# EAGLE board SparkFun_GPS_ZED-F9K_pHat (EAGLE 9.5.2)
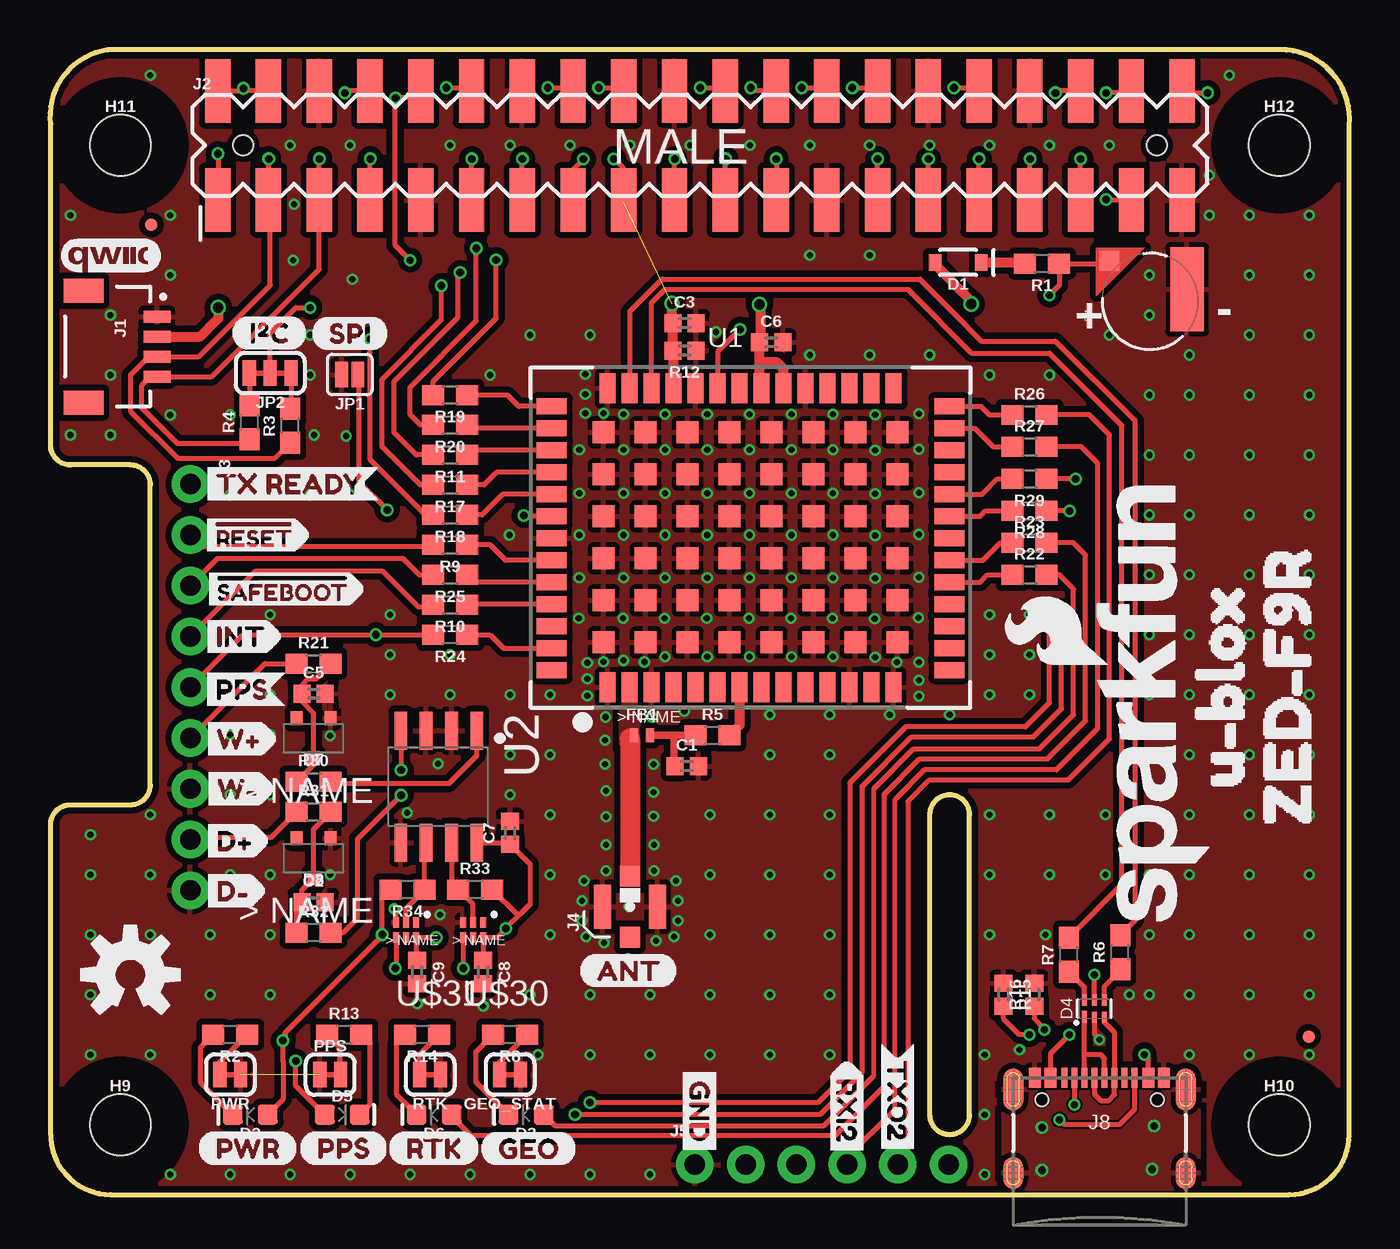
[diagram p0: board, top side]
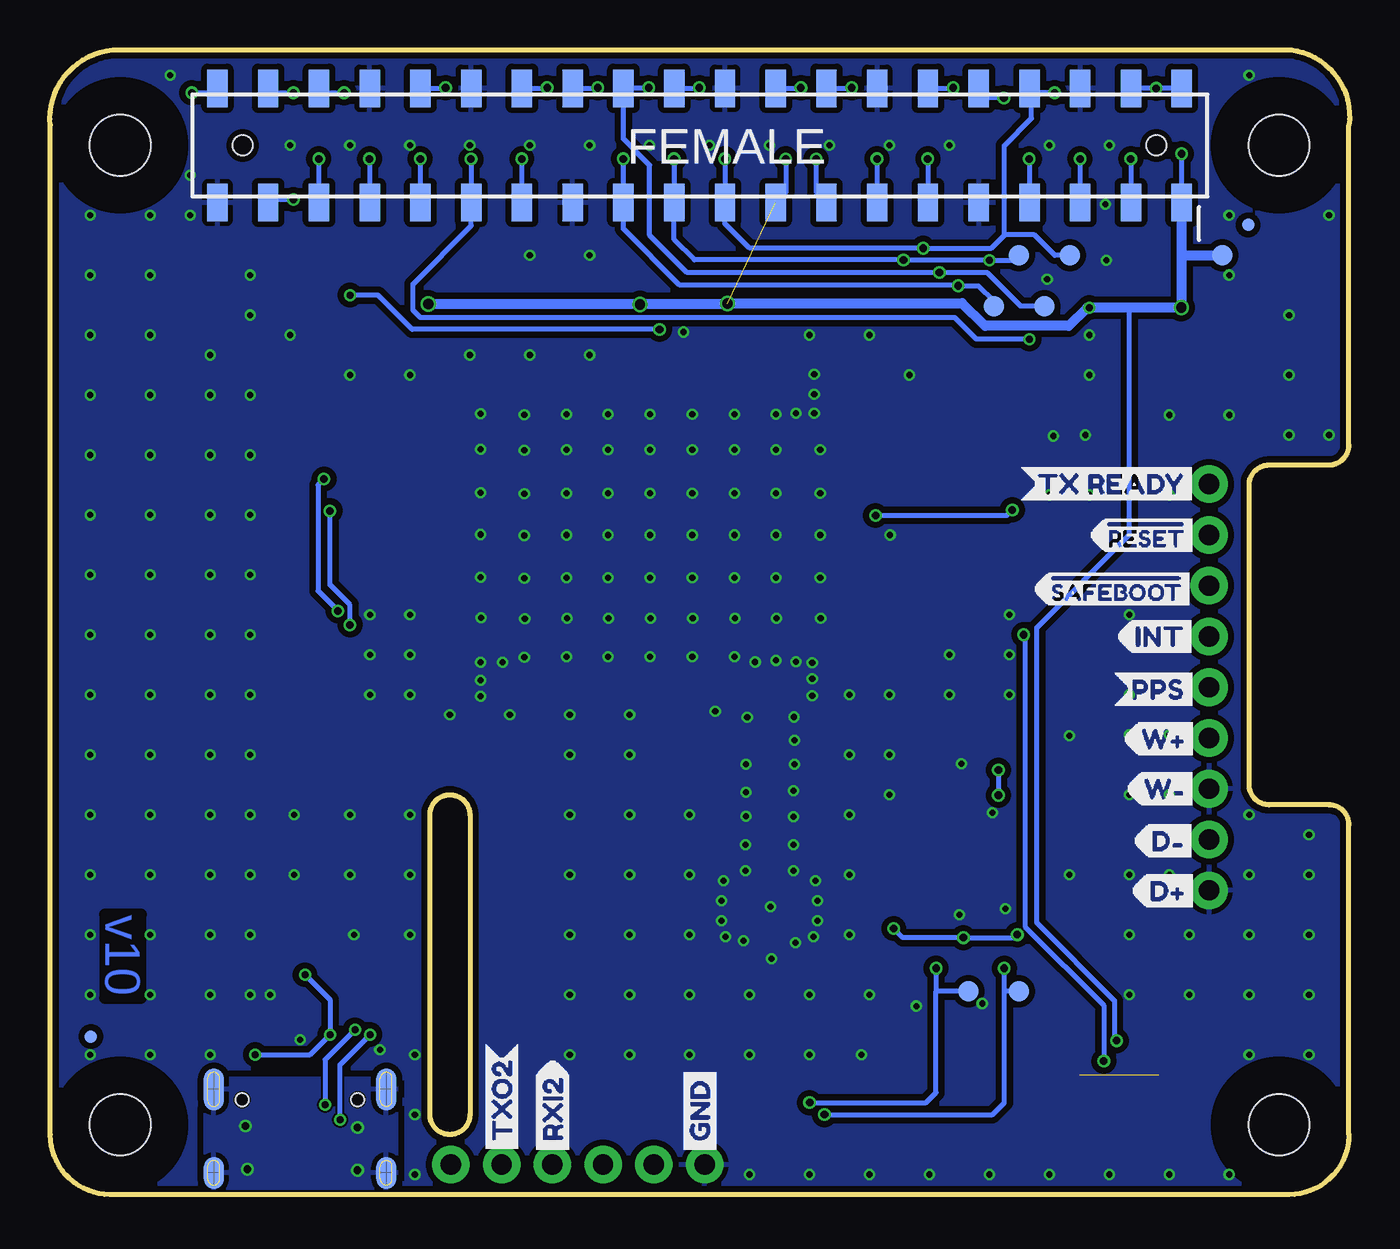
[diagram p1: board, bottom side, seen from below]

Size 65.04 x 57.26 mm. Coordinates in mm from the lower left corner, seen from the top.
Outline: 3.03,0 62.03,0 arc90 65.03,3 65.03,53.5 arc90 61.9,57.26 2.9,57.26 arc90 0.03,53.5 0.03,37.5 arc90 1.03,36.5 4.03,36.5 arc-90 5.03,35.5 5.03,20.5 arc-90 4.03,19.5 1.03,19.5 arc90 0.03,18.5 0.03,3 arc90 3.03,0
Outline: 45.03,3 arc90 46.03,4 46.03,19 arc90 45.03,20 arc90 44.03,19 44.03,4 arc90 45.03,3
Copper layers (1*16): Top 0.035mm / dielectric 1.5mm / Bottom 0.035mm
Design rules "SparkFun-2-layer-FAB-LIMIT": minimum track width 4mil, minimum drill 6mil, track to track 4mil, track to pad 4mil, pad to pad 4mil, via to via 4mil, smd to smd 4mil, copper to edge 4mil, drill to drill 4mil, minimum pad ring 5mil, minimum via ring 5mil, stop-mask expansion 4mil, vias tented up to drill 25mil, thermal gap 10mil
Net classes: 1 Antenna: width 1 mm, clearance 0.3 mm
tRestrict: area 58.4,0.4 to 64.6,6.6; area 0.4,0.4 to 6.6,6.6; area 0.4,49.4 to 6.6,55.6; area 58.4,49.4 to 64.6,55.6
bRestrict: area 0.4,0.4 to 6.6,6.6; area 0.4,49.4 to 6.6,55.6; area 58.4,0.4 to 64.6,6.6; area 58.4,49.4 to 64.6,55.6

## Footprints (pad centres in the part's own frame; a part is rotated, then mirrored left to right if it is on the bottom)
ML414H_IV01E = smd 1 x 1: + 2.022,2.032 | smd 4.2 x 1.7: - 0.6,-1.85
0402 = smd 0.85 x 0.9: 1 -0.58,0; 2 0.58,0
SOD-323 = smd 0.63 x 0.83: A 1.15,0; C -1.15,0
LED-0603 = smd 1 x 1: A -0.877,0; C 0.877,0
SOT886 = smd 0.61 x 0.25: 1 -0.405,0.5 | smd 0.56 x 0.25: 2 -0.43,0; 3 -0.43,-0.5; 4 0.43,-0.5; 5 0.43,0; 6 0.43,0.5
SOT23_BZX = smd 0.6 x 0.7: P1 -0.85,-0.984; P2 0.85,-0.984; P3 0,1.016
0402_MURATA = smd 0.4 x 0.7: P1 -0.4,0; P2 0.4,0
FIDUCIAL-MICRO = smd 0.635 x 0.635: 1 0,0
SMT-JUMPER_2_NC_TRACE_SILK = smd 0.66 x 1.27: 1 -0.521,0; 2 0.521,0
STAND-OFF-TIGHT = hole 3.048: 0,0
JST04_1MM_RA = smd 0.6 x 1.35: 1 -1.5,0; 2 -0.5,0; 3 0.5,0; 4 1.5,0 | smd 1.2 x 2: NC1 2.8,-3.675; NC2 -2.8,-3.675
RASPBERRY_PI_HAT_40_PIN_SMD_STACKABLE_NOHOLES_NOREF = smd 1.27 x 3.175: 1 0,-1.46; 2 0,4; 3 2.54,-1.46; 4 2.54,4; 5 5.08,-1.46; 6 5.08,4; 7 7.62,-1.46; 8 7.62,4; 9 10.16,-1.46; 10 10.16,4; 11 12.7,-1.46; 12 12.7,4; 13 15.24,-1.46; 14 15.24,4; 15 17.78,-1.46; 16 17.78,4; 17 20.32,-1.46; 18 20.32,4; 19 22.86,-1.46; 20 22.86,4; 21 25.4,-1.46; 22 25.4,4; 23 27.94,-1.46; 24 27.94,4; 25 30.48,-1.46; 26 30.48,4; 27 33.02,-1.46; 28 33.02,4; 29 35.56,-1.46; 30 35.56,4; 31 38.1,-1.46; 32 38.1,4; 33 40.64,-1.46; 34 40.64,4; 35 43.18,-1.46; 36 43.18,4; 37 45.72,-1.46; 38 45.72,4; 39 48.26,-1.46; 40 48.26,4 | smd 1.02 x 1.87 bottom: 1B 0,-1.587; 2B 0,4.128; 3B 2.54,-1.587; 4B 2.54,4.128; 5B 5.08,-1.587; 6B 5.08,4.128; 7B 7.62,-1.587; 8B 7.62,4.128; 9B 10.16,-1.587; 10B 10.16,4.128; 11B 12.7,-1.587; 12B 12.7,4.128; 13B 15.24,-1.587; 14B 15.24,4.128; 15B 17.78,-1.587; 16B 17.78,4.128; 17B 20.32,-1.587; 18B 20.32,4.128; 19B 22.86,-1.587; 20B 22.86,4.128; 21B 25.4,-1.587; 22B 25.4,4.128; 23B 27.94,-1.587; 24B 27.94,4.128; 25B 30.48,-1.587; 26B 30.48,4.128; 27B 33.02,-1.587; 28B 33.02,4.128; 29B 35.56,-1.587; 30B 35.56,4.128; 31B 38.1,-1.587; 32B 38.1,4.128; 33B 40.64,-1.587; 34B 40.64,4.128; 35B 43.18,-1.587; 36B 43.18,4.128; 37B 45.72,-1.587; 38B 45.72,4.128; 39B 48.26,-1.587; 40B 48.26,4.128 | hole 1: 1.27,1.27; 46.99,1.27
1X09_NO_SILK = drill 1.016 pad 1.88: 1 0,0; 2 2.54,0; 3 5.08,0; 4 7.62,0; 5 10.16,0; 6 12.7,0; 7 15.24,0; 8 17.78,0; 9 20.32,0
U.FL = smd 2.2 x 0.85: 1 0,1.375; 2 0,-1.375 | smd 1.05 x 1: FEED 1.525,0; NC -1.525,0
1X06_NO_SILK = drill 1.016 pad 1.88: 1 0,0; 2 2.54,0; 3 5.08,0; 4 7.62,0; 5 10.16,0; 6 12.7,0
USB-C-16P = smd 0.3 x 1: A5 -1.25,-0.34; A6 -0.25,-0.34; A7 0.25,-0.34; A8 1.25,-0.34; B5 1.75,-0.34; B6 0.75,-0.34; B7 -0.75,-0.34; B8 -1.75,-0.34 | smd 0.6 x 1: GND -3.225,-0.34; GND2 3.225,-0.34; VBUS1 -2.45,-0.34; VBUS2 2.45,-0.34 | smd 1 x 2.1: SHLD1 -4.32,-0.915; SHLD2 4.32,-0.915 | smd 1 x 2.1 bottom: SHLD3 -4.32,-0.915; SHLD4 4.32,-0.915 | smd 1 x 1.6: SHLD5 -4.32,-5.095; SHLD8 4.32,-5.095 | smd 1 x 1.6 bottom: SHLD6 -4.32,-5.095; SHLD7 4.32,-5.095 | hole 0.65: -2.89,-1.445; 2.89,-1.445
SMT-JUMPER_2_NO_SILK = smd 0.635 x 1.27: 1 -0.406,0; 2 0.406,0
SMT-JUMPER_3_2-NC_TRACE_SILK = smd 0.66 x 1.27: 1 -1.041,0; 2 0,0; 3 1.041,0
0603 = smd 1.1 x 1: 1 -0.85,0; 2 0.85,0
PAD.03X.04 = smd 1.016 x 1.016: P$1 0,0
UBLOX_ZED_F9R = smd 1.1 x 1.1: G1 -7.312,-5.37; G2 -5.212,-5.37; G3 -3.112,-5.37; G4 -1.012,-5.37; G5 1.088,-5.37; G6 3.188,-5.37; G7 5.288,-5.37; G8 7.388,-5.37; G9 7.388,-3.27; G10 5.288,-3.27; G11 3.188,-3.27; G12 1.088,-3.27; G13 -1.012,-3.27; G14 -3.112,-3.27; G15 -5.212,-3.27; G16 -7.312,-3.27; G17 -7.312,-1.17; G18 -5.212,-1.17; G19 -3.112,-1.17; G20 -1.012,-1.17; G21 1.088,-1.17; G22 3.188,-1.17; G23 5.288,-1.17; G24 7.388,-1.17; G25 7.388,0.93; G26 5.288,0.93; G27 3.188,0.93; G28 1.088,0.93; G29 -1.012,0.93; G30 -3.112,0.93; G31 -5.212,0.93; G32 -7.312,0.93; G33 -7.312,3.03; G34 -5.212,3.03; G35 -3.112,3.03; G36 -1.012,3.03; G37 1.088,3.03; G38 3.188,3.03; G39 5.288,3.03; G40 7.388,3.03; G41 7.388,5.13; G42 5.288,5.13; G43 3.188,5.13; G44 1.088,5.13; G45 -1.012,5.13; G46 -3.112,5.13; G47 -5.212,5.13; G48 -7.312,5.13 | smd 0.8 x 1.5: P1 -7.112,-7.62; P2 -6.012,-7.62; P3 -4.912,-7.62; P4 -3.812,-7.62; P5 -2.712,-7.62; P6 -1.612,-7.62; P7 -0.512,-7.62; P8 0.588,-7.62; P9 1.688,-7.62; P10 2.788,-7.62; P11 3.888,-7.62; P12 4.988,-7.62; P13 6.088,-7.62; P14 7.188,-7.62; P28 7.188,7.33; P29 6.088,7.33; P30 4.988,7.33; P31 3.888,7.33; P32 2.788,7.33; P33 1.688,7.33; P34 0.588,7.33; P35 -0.512,7.33; P36 -1.612,7.33; P37 -2.712,7.33; P38 -3.812,7.33; P39 -4.912,7.33; P40 -6.012,7.33; P41 -7.112,7.33 | smd 1.5 x 0.8: P15 9.988,-6.77; P16 9.988,-5.67; P17 9.988,-4.57; P18 9.988,-3.47; P19 9.988,-2.37; P20 9.988,-1.27; P21 9.988,-0.17; P22 9.988,0.93; P23 9.988,2.03; P24 9.988,3.13; P25 9.988,4.23; P26 9.988,5.33; P27 9.988,6.43; P42 -9.912,6.43; P43 -9.912,5.33; P44 -9.912,4.23; P45 -9.912,3.13; P46 -9.912,2.03; P47 -9.912,0.93; P48 -9.912,-0.17; P49 -9.912,-1.27; P50 -9.912,-2.37; P51 -9.912,-3.47; P52 -9.912,-4.57; P53 -9.912,-5.67; P54 -9.912,-6.77
SOP_8-PIN = smd 1.9 x 0.64: P1 -2.921,2.032; P2 -2.921,0.762; P3 -2.921,-0.508; P4 -2.921,-1.778; P5 2.679,-1.778; P6 2.679,-0.508; P7 2.679,0.762; P8 2.679,2.032
SIP6 = smd 0.3 x 0.52: P1 -0.508,-0.381; P2 -0.008,-0.381; P3 0.492,-0.381; P4 0.492,0.369; P5 -0.008,0.369; P6 -0.508,0.369

## Placement (x,y rotation side)
B1  ML414H_IV01E_BATTERY  [ML414H_IV01E]  55.06,44.69 90 top
C1  47pF  [0402]  31.87,21.44 0 top
C2  1nF  [0402]  13.19,14.63 0 top
C3  1.0uF  [0402]  31.76,43.6 0 top
C5  1nF  [0402]  13.19,25.06 0 top
C6  1.0uF  [0402]  36.1,42.63 0 top
C7  0.1uF  [0402]  23.03,18.09 90 top
C8  0.1uF  [0402]  21.67,11.13 270 top
C9  0.1uF  [0402]  18.37,11.13 270 top
D1  0.5A/40V/420mV  [SOD-323]  45.45,46.63 180 top
D2  RED  [LED-0603]  10.03,4 180 top
D3  BLUE  [LED-0603]  23.83,4 180 top
D4  PRTR5V0U2F  [SOT886]  52.27,9.31 90 top
D5  BLUE  [LED-0603]  14.63,4 0 top
D6  BLUE  [LED-0603]  19.23,4 180 top
D7  0.5A/40V/420mV  [SOT23_BZX]  13.19,22.84 180 top
D8  0.5A/40V/420mV  [SOT23_BZX]  13.19,16.84 180 top
FB1  120NH  [0402_MURATA]  29.63,22.97 0 top
FD9  FIDUCIALUFIDUCIAL  [FIDUCIAL-MICRO]  63,7.9 90 top
FD10  FIDUCIALUFIDUCIAL  [FIDUCIAL-MICRO]  63,7.9 270 bottom
FD11  FIDUCIALUFIDUCIAL  [FIDUCIAL-MICRO]  5.07,48.51 0 top
FD12  FIDUCIALUFIDUCIAL  [FIDUCIAL-MICRO]  5.07,48.51 0 bottom
FRAME2  FRAME-LEDGER  [CREATIVE_COMMONS]  1.8,-16.26 0 top  (outside the outline)
GEO_STAT  JUMPER-SMT_2_NC_TRACE_SILK  [SMT-JUMPER_2_NC_TRACE_SILK]  23.03,6 180 top
H9  STAND-OFFTIGHT  [STAND-OFF-TIGHT]  3.53,3.5 0 top
H10  STAND-OFFTIGHT  [STAND-OFF-TIGHT]  61.53,3.5 0 top
H11  STAND-OFFTIGHT  [STAND-OFF-TIGHT]  3.53,52.5 0 top
H12  STAND-OFFTIGHT  [STAND-OFF-TIGHT]  61.53,52.5 0 top
J1  QWIIC_RIGHT_ANGLE  [JST04_1MM_RA]  5.36,42.42 270 top
J2  RASPBERRYPI-40-PIN-GPIO_SMD_STACK_NOHOLES_NOREF  [RASPBERRY_PI_HAT_40_PIN_SMD_STACKABLE_NOHOLES_NOREF]  8.4,51.22 0 top
J3  [1X09_NO_SILK]  7.03,35.54 270 top
J4  U.FL  [U.FL]  29.03,14.41 90 top
J5  [1X06_NO_SILK]  32.28,1.5 0 top
J8  [USB-C-16P]  52.53,6.18 0 top
JP1  JUMPER-SMT_2_NO_SILK  [SMT-JUMPER_2_NO_SILK]  15,41.02 180 top
JP2  JUMPER-SMT_3_2-NC_TRACE_SILK  [SMT-JUMPER_3_2-NC_TRACE_SILK]  11.03,41.09 180 top
LOGO1  SFE_LOGO_NAME_FLAME.2_INCH  [SFE_LOGO_NAME_FLAME_.2]  55.18,24.64 90 top
LOGO2  OSHW-LOGOM  [OSHW-LOGO-M]  4.03,11 0 top
LOGO3  QWIIC_LOGO_5MM  [QWIIC_5MM]  3.03,47 0 top
PPS  JUMPER-SMT_2_NC_TRACE_SILK  [SMT-JUMPER_2_NC_TRACE_SILK]  14.03,6 0 top
PWR  JUMPER-SMT_2_NC_TRACE_SILK  [SMT-JUMPER_2_NC_TRACE_SILK]  9.03,6 180 top
R1  3.3k  [0603]  49.65,46.57 180 top
R2  1k  [0603]  9.03,8 180 top
R3  2.2k  [0603]  12.03,38.46 90 top
R4  2.2k  [0603]  9.99,38.64 90 top
R5  33  [0603]  33.16,22.97 0 top
R6  27  [0603]  53.56,12.13 90 top
R7  27  [0603]  50.99,12 90 top
R8  1k  [0603]  23.03,8 180 top
R9  33  [0603]  20.03,32.5 180 top
R10  33  [0603]  20.03,29.5 180 top
R11  33  [0603]  20.03,37 180 top
R12  100K  [0402]  31.76,42.23 180 top
R13  1k  [0603]  14.73,8 0 top
R14  1k  [0603]  18.63,8 180 top
R15  5.1k  [0402]  47.72,10 270 top
R16  5.1k  [0402]  49.26,10 270 top
R17  33  [0603]  20.03,35.5 180 top
R18  33  [0603]  20.03,34 180 top
R19  33  [0603]  20.03,40 180 top
R20  33  [0603]  20.03,38.5 180 top
R21  3.3k  [0603]  13.19,26.56 0 top
R22  33  [0603]  49.03,31 0 top
R23  33  [0603]  49.03,32.6 0 top
R24  33  [0603]  20.03,28 180 top
R25  33  [0603]  20.03,31 180 top
R26  33  [0603]  49.03,39 0 top
R27  33  [0603]  49.03,37.4 0 top
R28  33  [0603]  49.03,34.2 180 top
R29  33  [0603]  49.03,35.8 180 top
R30  470  [0603]  13.19,20.66 0 top
R31  3.3k  [0603]  13.19,19.15 0 top
R32  470  [0603]  13.19,13.1 0 top
R33  910  [0603]  21.28,15.26 0 top
R34  910  [0603]  17.89,15.26 180 top
RTK  JUMPER-SMT_2_NC_TRACE_SILK  [SMT-JUMPER_2_NC_TRACE_SILK]  19.03,6 180 top
TP1  TEST-POINT3X4  [PAD.03X.04]  14,46.99 270 bottom
TP2  TEST-POINT3X4  [PAD.03X.04]  16.54,46.99 270 bottom
TP3  TEST-POINT3X4  [PAD.03X.04]  17.81,44.45 270 bottom
TP4  TEST-POINT3X4  [PAD.03X.04]  15.27,44.45 270 bottom
TP5  TEST-POINT3X4  [PAD.03X.04]  6.38,46.99 0 bottom
TP6  TEST-POINT3X4  [PAD.03X.04]  19.08,10.16 270 bottom
TP7  TEST-POINT3X4  [PAD.03X.04]  16.54,10.16 270 bottom
U1  UBLOX_ZED_F9R  [UBLOX_ZED_F9R]  35.03,33 0 top
U2  HCPL-270L  [SOP_8-PIN]  19.33,20.28 270 top
U$1  [INT1]  7.38,27.92 0 top
U$2  [PPS4]  7.38,25.27 0 top
U$3  [PPS6]  12.47,2.31 0 top
U$4  [PWR7]  7.39,2.31 0 top
U$5  [RTK5]  16.91,2.31 0 top
U$6  [RXI28]  39.88,6.72 270 top
U$7  [#RESET1]  7.23,33 0 top
U$8  [#RESET2]  13.18,32.99 0 bottom
U$9  [TX_READY0]  7.38,35.56 0 top
U$10  [TXO21]  42.42,7.65 270 top
U$11  [INT2]  11.68,27.92 0 bottom
U$12  [PPS1]  11.84,25.27 0 bottom
U$13  [#SAFEBOOT0]  7.28,30.29 0 top
U$14  [RXI26]  39.88,1.76 90 bottom
U$15  [#SAFEBOOT3]  16.03,30.29 0 bottom
U$16  [TXO25]  42.42,1.76 90 bottom
U$17  [TX_READY0]  16.54,35.56 0 bottom
U$18  [GND-04]  32.51,6.59 270 top
U$19  [GND-04]  32.51,1.76 90 bottom
U$20  [I_SUPER2_C-()-04]  9.07,43.1 0 top
U$21  [ANT1]  26.44,11.2 0 top
U$22  [D#0]  7.43,17.7 0 top
U$23  [D#1]  7.43,15.2 0 top
U$24  [SPI0]  13.07,43.08 0 top
U$25  [U#BLOX1]  58.59,18.26 90 top
U$26  [ZED#F9R0]  61.93,16.5 90 top
U$27  [W#2]  7.43,22.8 0 top
U$28  [W#3]  7.43,20.3 0 top
U$29  [GEO0]  21.53,2.3 0 top
U$30  UHS_INVERTER_SCHMITT_TRIGGERSIP6  [SIP6]  21.16,13.23 180 top
U$31  UHS_INVERTER_SCHMITT_TRIGGERSIP6  [SIP6]  17.81,13.23 180 top
U$32  [D#0]  10.93,15.2 0 bottom
U$33  [D#1]  10.83,17.7 0 bottom
U$34  [W#2]  11.33,22.8 0 bottom
U$35  [W#3]  11.23,20.3 0 bottom

## Library data of the parts
B1 = SparkFun-Batteries; PROD_ID: BATT-14267
C1 = SparkFun-Capacitors; PROD_ID: CAP-15063
C2 C5 = SparkFun-Capacitors; PROD_ID: CAP-15061
C3 C6 = SparkFun-Capacitors; PROD_ID: CAP-12417
C7-C9 = SparkFun-Capacitors; PROD_ID: CAP-14993
D1 = SparkFun-DiscreteSemi; PROD_ID: DIO-10955
D2 = SparkFun-LED; PROD_ID: DIO-00819
D3 D5 D6 = SparkFun-LED; PROD_ID: DIO-08575
D4 = SparkFun-IC-Power; PROD_ID: DIO-14084
D7 D8 R33 R34 U2 U$30 U$31 = classified
FB1 = SparkFun-Coils
FD9-FD12 FRAME2 LOGO1-LOGO3 = SparkFun-Aesthetics
GEO_STAT JP1 JP2 PPS PWR RTK = SparkFun-Jumpers
H9-H12 = SparkFun-Hardware
J1 = SparkFun-Connectors; PROD_ID: CONN-13694
J2 J3 J5 TP1-TP7 = SparkFun-Connectors
J4 = SparkFun-Connectors; PROD_ID: CONN-09193; SF_ID: WRL-09144
J8 = SparkFun-Connectors; PROD_ID: CONN-14122
R1 R21 R31 = SparkFun-Resistors; PROD_ID: RES-07851
R2 R8 R13 R14 = SparkFun-Resistors; PROD_ID: RES-07856
R3 R4 = SparkFun-Resistors; PROD_ID: RES-08272
R5 R9-R11 R17-R20 R22-R29 = SparkFun-Resistors; PROD_ID: RES-08270
R6 R7 = SparkFun-Resistors; PROD_ID: RES-09334
R12 = SparkFun-Resistors; PROD_ID: RES-13495
R15 R16 = SparkFun-Resistors; PROD_ID: RES-14340
R30 R32 = SparkFun-Resistors; PROD_ID: RES-07869
U1 = classified; PROD_ID: IC-14716
U$1-U$6 U$9 = ALL_LABELS
U$7 U$8 U$13 U$15 = corrected_safe_reset
U$10 = moar
U$11 U$12 U$14 U$16 U$17 = bottom labels
U$18-U$20 = Labels
U$21 U$24 = even_moar
U$22 U$23 U$27 U$28 = wt_dir_top
U$25 U$26 = zed
U$29 = geo
U$32-U$35 = wt_dir

## Nets
3.3V: C3.1 C6.1 C7.1 C8.1 C9.1 D1.A D2.A J1.2 J2.1 J2.1B J2.17 J2.17B JP2.2 R12.2 R33.2 R34.2 TP5.P$1 U1.P33 U1.P34 U1.P38 U2.P8 U$30.P6 U$31.P6
5V: J2.2 J2.2B J2.4 J2.4B
!RESET: J3.2 R9.2
!SAFEBOOT: J3.3 R25.2
CE1: J2.26 J2.26B
D_SEL: JP1.1 U1.P47
DIR+: J3.8 R31.1
DIR_IN: R32.2 U2.P4
DIR_OUT: R29.1 TP7.P$1 U$31.P4
DIR_SCHMITT: R34.1 U2.P6 U$31.P2
DMINUS: R7.2 U1.P39
DPLUS: R6.2 U1.P40
GEOF_STAT: D3.A R22.2
GND: B1.- C1.2 C2.2 C3.2 C5.2 C6.2 C7.2 C8.2 C9.2 D4.2 D7.P1 D8.P1 GEO_STAT.1 J1.1 J2.6 J2.6B J2.9 J2.9B J2.14 J2.14B J2.20 J2.20B J2.25 J2.25B J2.30 J2.30B J2.34 J2.34B J2.39 J2.39B J3.7 J3.9 J4.1 J4.2 J5.1 J8.GND J8.GND2 JP1.2 PPS.1 PWR.1 R12.1 R15.1 R16.1 RTK.1 U1.G1 U1.G2 U1.G3 U1.G4 U1.G5 U1.G6 U1.G7 U1.G8 U1.G9 U1.G10 U1.G11 U1.G12 U1.G13 U1.G14 U1.G15 U1.G16 U1.G17 U1.G18 U1.G19 U1.G20 U1.G21 U1.G22 U1.G23 U1.G24 U1.G25 U1.G26 U1.G27 U1.G28 U1.G29 U1.G30 U1.G31 U1.G32 U1.G33 U1.G34 U1.G35 U1.G36 U1.G37 U1.G38 U1.G39 U1.G40 U1.G41 U1.G42 U1.G43 U1.G44 U1.G45 U1.G46 U1.G47 U1.G48 U1.P1 U1.P3 U1.P12 U1.P14 U1.P32 U1.P37 U1.P41 U1.P48 U2.P2 U2.P3 U2.P5 U$30.P3 U$31.P3
GP4: J2.7 J2.7B
GP6: J2.31 J2.31B
GP12: J2.32 J2.32B
GP13: J2.33 J2.33B
GP16: J2.36 J2.36B
GP17: J2.11 J2.11B
GP18: J2.12 J2.12B
GP19: J2.35 J2.35B
GP20: J2.38 J2.38B
GP21: J2.40 J2.40B
GP22: J2.15 J2.15B
GP23: J2.16 J2.16B
GP24: J2.18 J2.18B
GP25: J2.22 J2.22B
GP26: J2.37 J2.37B
GP27: J2.13 J2.13B
ID_SC: J2.28 J2.28B
ID_SD: J2.27 J2.27B
INT: J3.4 R10.2
N$1: JP2.1 R3.2
N$2: D1.C R1.2
N$3: JP2.3 R4.2
N$4: D2.C R2.2
N$5: C1.1 FB1.P2 R5.1
N$6: D4.6 R7.1
N$7: D4.4 R6.1
N$8: PWR.2 R2.1
N$9: D4.3 J8.A6 J8.B6
N$10: D4.5 J8.VBUS1 J8.VBUS2
N$11: D4.1 J8.A7 J8.B7
N$12: J8.B5 R15.2
N$13: R9.1 U1.P49
N$14: R10.1 U1.P51
N$15: R11.1 U1.P44
N$16: GEO_STAT.2 R8.1
N$17: D3.C R8.2
N$18: J8.A5 R16.2
N$19: R17.1 U1.P45
N$20: R18.1 U1.P46
N$21: R19.1 U1.P42
N$22: R14.1 RTK.2
N$23: PPS.2 R13.1
N$24: D5.C R13.2
N$25: D6.C R14.2
N$26: R20.1 U1.P43
N$27: C5.1 D7.P3 R21.2 R30.1
N$28: R22.1 U1.P19
N$29: R23.1 U1.P20
N$30: R24.1 U1.P53
N$31: R25.1 U1.P50
N$32: R26.1 U1.P27
N$33: R27.1 U1.P26
N$34: R28.2 U1.P22
N$35: R29.2 U1.P23
N$36: C2.1 D8.P3 R31.2 R32.1
PPS: D5.A J3.5 R24.2
QWIIC_SCL: J1.4 J2.5 J2.5B R4.1
QWIIC_SDA: J1.3 J2.3 J2.3B R3.1
RF_IN [Antenna]: FB1.P1 J4.FEED U1.P2
RTK_STAT: D6.A R23.2
RXI2: J5.4 R27.2
RXI/MOSI: J2.8 J2.8B J2.19 J2.19B R20.2 TP1.P$1
SCL/CLK: J2.23 J2.23B R17.2 TP3.P$1
SDA/!CS: J2.24 J2.24B R11.2 TP4.P$1
SHIELD: J8.SHLD1 J8.SHLD2 J8.SHLD3 J8.SHLD4 J8.SHLD5 J8.SHLD6 J8.SHLD7 J8.SHLD8
TX_READY: J2.29 J2.29B R18.2
TXO2: J5.5 R26.2
TXO/MISO: J2.10 J2.10B J2.21 J2.21B R19.2 TP2.P$1
V_BATT: B1.+ R1.1 U1.P36
V_RF: R5.2 U1.P7
WT+: J3.6 R21.1
WT_IN: R30.2 U2.P1
WT_OUT: R28.1 TP6.P$1 U$30.P4
WT_SCHMITT: R33.1 U2.P7 U$30.P2

## Tracks (layer width: path | path; a pad name or v marks a point on that pad's centre or on a via)
3.3V  (via drill 0.35, 0.38, 0.51)  (1 unrouted)
  Top 0.254: JP2.2 11.03,43.1 12.3,44.37 v13.03,44.37 | D2.A 11.67,4.76 11.67,6.68 11.66,6.68 v11.66,7.7 11.76,7.8 11.76,8.09 16.63,12.95 v16.63,13 16.63,14.84 R34.2 | v8.41,52.07 8.41,49.77 J2.1 | J2.17 28.72,51.31 v28.22,51.81 | U2.P8 22.94,17.61 C7.1 24.03,16.51 24.03,14.53 23.49,13.99 | 23.49,13.99 v22.81,13.31 22.38,12.88 21.68,12.88 U$30.P6 C8.1 | R33.2 23.39,13.99 23.49,13.99 | v19.33,12.85 19.32,12.86 U$31.P6 18.32,11.84 arc45 C9.1
  Top 0.508: v8.42,44.37 8.42,43.83 7.51,42.92 J1.2 | R12.2 31.18,40.36 U1.P38 | U1.P34 35.52,40.43 35.52,41.63 | 35.52,41.63 C6.1 35.57,42.69 35.57,44.47 v35.51,44.52 | U1.P33 36.71,41.31 36.4,41.63 35.52,41.63 | R12.2 31.04,42.37 | v46.1,44.55 46.1,44.73 44.3,46.53 D1.A | R12.2 C3.1 31.13,43.66 v31.13,44.58
  Bottom 0.254: 11.03,44.37 11.03,33 15.66,28.37 15.66,13.6 11.76,9.7 11.76,7.8 v11.66,7.7 | J2.1B v8.4,52.06 v8.41,52.07 | v28.22,51.81 28.22,50.13 J2.17B | v22.81,13.31 22.35,12.85 v19.33,12.85 16.78,12.85 v16.63,13
  Bottom 0.508: v46.1,44.55 46.08,44.58 35.56,44.58 v35.51,44.52 35.46,44.58 v31.13,44.58 31.1,44.6 19.39,44.6 18.24,43.46 14.05,43.46 13.13,44.37 v13.03,44.37 11.03,44.37 v8.42,44.37 8.4,44.4 8.4,46.99 | 8.4,46.99 J2.1B | 8.4,46.99 TP5.P$1
5V  (via drill 0.38)
  Top 0.254: J2.4 9.81,55.22 | 9.81,55.22 v9.68,55.34 | J2.2 9.81,55.22
  Bottom 0.254: J2.2B v9.68,55.34 J2.4B
!RESET
  Top 0.254: J3.2 7.63,32.4 19.08,32.4 R9.2
!SAFEBOOT
  Top 0.254: R25.2 18.48,31 17.68,31.8 8.37,31.8 J3.3
CE1  (via drill 0.38)
  Top 0.254: v37.62,55.37 38.72,55.37 J2.26
  Bottom 0.254: J2.26B 37.65,55.34 v37.62,55.37
D_SEL  (via drill 0.38)
  Top 0.254: v23.72,33.98 23.76,33.93 U1.P47 | v16.88,34.25 15.46,35.67 15.46,40.97 JP1.1
  Bottom 0.254: v23.72,33.98 17.15,33.98 v16.88,34.25
DIR+
  Top 0.254: J3.8 7.12,17.85 11.04,17.85 R31.1
DIR_IN  (via drill 0.38)
  Top 0.254: v17.58,19.98 17.38,19.78 15.39,17.8 15.39,13.83 14.67,13.1 R32.2 | U2.P4 17.58,23.19 v17.58,21.24
  Bottom 0.254: v17.58,21.24 v17.58,19.98
DIR_OUT  (via drill 0.38)
  Top 0.254: v26.28,4 38.53,4 40.63,6.1 40.63,20.4 43.13,22.9 49.23,22.9 50.63,24.3 v50.63,29.2 | v51.33,35.8 R29.1 | v17.28,11.32 17.32,11.36 U$31.P4
  Bottom 0.254: v51.33,35.8 51.63,35.5 51.63,30.2 v50.63,29.2 | 17.28,10.16 17.28,4.59 17.87,4 v26.28,4 | 17.28,10.16 v17.28,11.32 | TP7.P$1 17.28,10.16
DIR_SCHMITT
  Top 0.254: U$31.P2 17.82,14.33 R34.1 18.74,17.52 U2.P6
DMINUS
  Top 0.254: U1.P39 30.11,44.62 30.77,45.28 42.03,45.28 42.04,45.28 42.95,45.28 46.13,42.1 50.03,42.1 53.66,38.47 53.66,15.51 R7.2
DPLUS
  Top 0.254: U1.P40 29.01,44.17 30.63,45.8 43.55,45.8 45.93,43.42 45.93,43.4 46.63,42.7 50.31,42.7 54.31,38.7 54.31,13.73 R6.2
GEOF_STAT
  Top 0.254: D3.A 24.73,4 25.28,3.45 38.73,3.45 41.23,5.95 41.23,20.3 43.23,22.3 49.53,22.3 51.23,24 51.23,30.3 50.53,31 R22.2
GND  (via drill 0.3)  (1 unrouted)
  Top 0.254: D4.2 52.27,8.01 v52.53,7.75 | U$31.P3 17.32,14.21 v17.23,14.3 | 18.95,23.08 U2.P3
  other vias: 26.79,39.09 28.7,39.04 30.79,39.04 32.89,39.04 35,39.04 37.11,39.04 39.19,39.04 41.3,39.01 43.49,39.07 26.49,37.26 28.7,37.26 30.79,37.26 32.89,37.26 35,37.26 37.11,37.26 39.19,37.26 41.3,37.24 43.49,37.29 26.49,35.08 28.7,35.08 30.79,35.08 32.89,35.08 35,35.08 37.11,35.08 39.19,35.08 41.3,35.05 43.49,35.1 26.49,32.99 28.7,32.99 30.79,32.99 32.89,32.99 35,32.99 37.11,32.99 39.19,32.99 41.3,32.97 43.49,33.02 26.49,30.86 28.7,30.86 30.79,30.86 32.89,30.86 35,30.86 37.11,30.86 39.19,30.86 41.3,30.84 43.49,30.89 26.47,28.83 28.68,28.83 30.76,28.83 32.87,28.83 34.98,28.83 37.09,28.83 39.17,28.83 41.28,28.8 43.46,28.85 26.89,26.6 28.7,26.72 30.79,26.9 32.89,26.9 35,26.9 37.11,26.9 39.19,26.9 41.3,26.87 43.49,26.62 57.03,25 57.03,22 57.03,19 57.03,16 57.03,13 57.03,10 60.03,22 60.03,19 60.03,16 60.03,13 60.03,10 60.03,7 33.03,19 36.03,19 33.03,16 36.03,16 33.03,13 36.03,13 33.03,10 36.03,10 33.03,7 36.03,7 39.03,19 39.03,16 39.03,13 39.03,10 39.03,7 26.73,15.69 27.73,12.59 36.03,22 39.03,22 45.03,24 28.93,11.79 27.78,21.52 27.83,18.89 27.83,16.19 26.63,13.69 31.43,13.69 31.33,15.69 30.23,16.19 30.2,21.52 30.33,12.69 27.81,23.89 2.03,16 5.03,16 2.03,13 5.03,13 2.03,10 5.03,10 2.03,7 5.03,7 13.23,38 13.03,41 3.03,38 13.03,43 9.03,35 24.03,43 27.03,43 38.03,42 41.03,42 44.03,42 38.03,47 41.03,47 53.03,43 57.03,42 57.03,40 60.03,43 63.03,43 60.03,46 63.03,46 60.03,28 60.03,31 57.03,31 57.03,34 12.18,46.75 12.23,49.55 63.03,13 63.03,10 63.03,7 1.03,38 1.03,49 6.03,49 6.03,46 3.03,44 3.03,41 43.49,25.72 43.49,24.92 26.89,25.8 26.89,24.95 26.79,40.04 26.79,41.04 27.7,39.09 27.7,26.65 42.39,26.62 28.98,14.4 30.15,23.88 30.2,20.12 27.03,1 24.03,1 21.03,1 18.03,1 15.03,1 12.03,1 9.03,1 6.03,1 42.03,24 39.03,24 36.03,24 5.03,19 2.03,18 60.03,25 57.03,28 60.03,34 60.03,37 57.03,37 60.03,40 63.03,22 63.03,19 63.03,16 63.03,28 63.03,31 63.03,25 63.03,34 63.03,37 63.03,40 47.03,13 63.03,49 60.03,49 55.03,46 55.03,44 54.03,10 57.03,7 48.53,7.25 46.78,1 46.78,4 46.78,7 26.63,14.69 31.43,14.69 26.83,12.89 31.23,12.89 29.75,26.64 30.03,1 11.03,29 17.03,29 13.03,35 14.83,37.95 15.03,35 22.03,41 47.03,29 47.03,27 47.03,25 49.03,25 49.03,27 49.03,29 52.83,19 50.03,19 47.03,19 47.03,16 50.03,16 52.83,16 49.83,13 47.03,41 50.03,41 22.99,32.99 55.03,25 55.03,22 55.03,19 55.03,16 55.03,13 55.03,10 55.03,31 55.03,34 55.03,28 55.03,37 55.03,40 58.03,49 58.03,51 53.03,52.5 50.03,52.5 47.03,52.5 44.03,52.5 41.03,52.5 38.03,52.5 35.03,52.5 32.03,52.5 29.03,52.5 26.03,52.5 23.03,52.5 20.03,52.5 15.03,52.5 12.03,52.5 59.03,56 5.03,56 15.14,45.79 30.03,10 30.03,7 17.88,19.1 27.03,10 27.03,7 24.03,10 24.43,7 25.03,13 25.03,16 25.03,19 25.03,22 23.03,22 23.03,20 27.83,20.19 27.83,17.49 30.2,18.92 30.23,17.49 27.78,22.72 31.75,24.18 8.03,10 8.03,13 11.03,13 11.03,10 25.03,25 23.03,25 20.03,25 17.03,25 17.03,27 20.03,27 11.03,20 9.03,20 11.03,16 9.03,16 9.03,39 6.03,39 19.53,14 11.03,23 18.38,9.55 21.69,9.43 33.33,43.15 14.03,16 14.03,22.95 19.43,21.55 9.03,23 11.03,25
  pour Top (isolate 0.305, rank 3): 62.03,0 arc90 65.03,3 65.03,53.5 arc90 61.26,57.26 3.79,57.26 arc90 0.03,53.5 0.03,3 arc90 3.03,0
  pour Bottom (isolate 0.305, rank 3): 3.03,0 arc-90 0.03,3 0.03,53.5 arc-90 3.79,57.26 61.26,57.26 arc-90 65.03,53.5 65.03,3 arc-90 62.03,0
GP4  (via drill 0.38)
  Top 0.254: J2.7 16.02,51.81 v16.03,51.82
  Bottom 0.254: v16.03,51.82 16.03,49.64 J2.7B
GP6  (via drill 0.38)
  Top 0.254: J2.31 46.5,51.81 v46.51,51.82
  Bottom 0.254: v46.51,51.82 46.51,49.64 J2.31B
GP12  (via drill 0.38)
  Top 0.254: v45.24,55.37 46.34,55.37 J2.32
  Bottom 0.254: J2.32B 45.27,55.34 v45.24,55.37
GP13  (via drill 0.38)
  Top 0.254: J2.33 49.04,51.81 v49.05,51.82
  Bottom 0.254: v49.05,51.82 49.05,49.64 J2.33B
GP16  (via drill 0.38)
  Top 0.254: J2.36 50.42,55.22 v50.32,55.12
  Bottom 0.254: J2.36B 51.35,55.12 v50.32,55.12
GP17  (via drill 0.38)
  Top 0.254: J2.11 21.1,51.81 v21.11,51.82
  Bottom 0.254: v21.11,51.82 21.11,49.64 J2.11B
GP18  (via drill 0.38)
  Top 0.254: v19.84,55.37 20.94,55.37 J2.12
  Bottom 0.254: J2.12B 19.87,55.34 v19.84,55.37
GP19  (via drill 0.38)
  Top 0.254: J2.35 51.58,51.81 v51.59,51.82
  Bottom 0.254: v51.59,51.82 51.59,49.64 J2.35B
GP20  (via drill 0.38)
  Top 0.254: J2.38 54.02,55.12 v52.86,55.12
  Bottom 0.254: J2.38B 53.89,55.12 v52.86,55.12
GP21  (via drill 0.38)
  Top 0.254: J2.40 56.76,55.12 v57.94,55.12
  Bottom 0.254: v57.94,55.12 56.88,55.12 J2.40B
GP22  (via drill 0.38)
  Top 0.254: J2.15 26.18,51.28 v26.7,51.8
  Bottom 0.254: v26.7,51.8 26.7,50.15 J2.15B
GP23  (via drill 0.38)
  Top 0.254: v24.92,55.37 26.02,55.37 J2.16
  Bottom 0.254: J2.16B 24.95,55.34 v24.92,55.37
GP24  (via drill 0.38)
  Top 0.254: J2.18 28.62,55.12 28.37,55.37 v27.46,55.37
  Bottom 0.254: J2.18B 27.49,55.34 v27.46,55.37
GP25  (via drill 0.38)
  Top 0.254: v32.54,55.37 33.64,55.37 J2.22
  Bottom 0.254: J2.22B 32.57,55.34 v32.54,55.37
GP26  (via drill 0.38)
  Top 0.254: J2.37 52.89,49.76 v52.86,49.78
  Bottom 0.254: J2.37B 53.96,49.78 v52.86,49.78
GP27  (via drill 0.38)
  Top 0.254: J2.13 23.64,51.81 v23.65,51.82
  Bottom 0.254: v23.65,51.82 23.65,49.64 J2.13B
ID_SC  (via drill 0.38)
  Top 0.254: v40.16,55.37 41.26,55.37 J2.28
  Bottom 0.254: J2.28B 40.19,55.34 v40.16,55.37
ID_SD  (via drill 0.38)
  Top 0.254: J2.27 41.42,51.81 v41.43,51.82
  Bottom 0.254: v41.43,51.82 41.43,49.64 J2.27B
INT
  Top 0.254: J3.4 10.31,31.2 16.63,31.2 18.43,29.4 19.08,29.4 R10.2
N$1
  Top 0.254: JP2.1 12.07,39.35 R3.2
N$2
  Top 0.508: D1.C 48.73,46.63 R1.2
N$3
  Top 0.254: JP2.3 R4.2
N$4
  Top 0.254: R2.2 7.53,7.35 7.53,5.62 D2.C
N$5
  Top 0.381: R5.1 31.23,22.97 | 31.23,22.97 FB1.P2 | C1.1 arc-45 31.23,21.6 31.23,22.97
N$6
  Top 0.254: D4.6 51.77,10.38 R7.1
N$7
  Top 0.254: D4.4 52.77,10.39 53.56,11.18 R6.1
N$8
  Top 0.254: PWR.2 8.51,6.63 R2.1
N$9
  Top 0.254: D4.3 52.77,8.63 53.28,8.12 J8.B6 53.28,4.99 52.99,4.7 52.6,4.7 52.28,5.03 J8.A6
N$10  (via drill 0.35)
  Top 0.254: J8.VBUS2 54.98,6.8 v54.78,7 | v51.03,8 50.08,7.05 J8.VBUS1 | D4.5 v52.27,10.99 v52.28,11
  Bottom 0.254: v54.78,7 52.03,7 v51.03,8 51.03,9.75 v52.28,11
N$11
  Top 0.254: J8.A7 52.78,6.81 52.6,6.99 51.78,6.99 | J8.B7 51.78,6.99 | 51.78,6.99 D4.1
N$12  (via drill 0.35)
  Top 0.254: J8.B5 54.28,4.25 53.53,3.5 50.78,3.5 v50.53,3.75 | v49.03,8 48.53,8 47.72,8.8 R15.2
  Bottom 0.254: v50.53,3.75 50.53,6.5 v49.03,8
N$13
  Top 0.254: U1.P49 22.8,31.73 22.03,32.5 R9.1
N$14
  Top 0.254: U1.P51 20.91,29.53 R10.1
N$15
  Top 0.254: U1.P44 21.11,37.23 R11.1
N$16
  Top 0.254: R8.1 22.56,6.68 22.52,6.64 22.51,6.63 GEO_STAT.2
N$17
  Top 0.254: R8.2 21.32,7.14 21.32,5.63 D3.C
N$18  (via drill 0.35)
  Top 0.254: J8.A5 v51.28,4.5 | R16.2 49.26,8.82 49.78,8.3 v49.78,8.25
  Bottom 0.254: v51.28,4.5 51.28,6.75 v49.78,8.25
N$19
  Top 0.254: U1.P45 22.36,36.13 21.73,35.5 R17.1
N$20
  Top 0.254: U1.P46 22.66,35.03 21.63,34 R18.1
N$21
  Top 0.254: U1.P42 23.46,39.43 22.89,40 R19.1
N$22
  Top 0.254: RTK.2 18.51,7.03 R14.1
N$23
  Top 0.254: R13.1 14.53,7.34 14.53,6.01 PPS.2
N$24
  Top 0.254: D5.C 16.03,4.52 16.03,7.55 R13.2
N$25
  Top 0.254: R14.2 17.33,7.55 17.33,5.02 D6.C
N$26
  Top 0.254: U1.P43 21.05,38.33 R20.1
N$27
  Top 0.254: R21.2 14.04,26.52 13.33,25.8 12.93,25.8 12.61,25.49 C5.1 12.61,24.67 13.19,24.09 D7.P3 13.19,21.51 R30.1
N$28
  Top 0.254: U1.P19 46.56,30.63 46.93,31 R22.1
N$29
  Top 0.254: U1.P20 46.7,31.73 47.57,32.6 R23.1
N$30
  Top 0.254: R24.1 22.03,28 22.7,27.33 U1.P53
N$31
  Top 0.254: U1.P50 21.25,30.63 R25.1
N$32
  Top 0.254: U1.P27 46.6,39.43 47.03,39 R26.1
N$33
  Top 0.254: U1.P26 46.3,38.33 47.23,37.4 R27.1
N$34
  Top 0.254: U1.P22 46.56,33.93 46.83,34.2 R28.2
N$35
  Top 0.254: U1.P23 46.66,35.03 47.43,35.8 R29.2
N$36
  Top 0.254: R31.2 14.04,19.13 13.19,18.28 D8.P3 12.61,15.25 C2.1 12.34,14.63 R32.1
PPS  (via drill 0.38)
  Top 0.254: D5.A 12.3,5.45 v12.3,6.67 | J3.5 9.65,28 v16.32,28 | v16.32,28 R24.2 | v16.31,28.01 v16.32,28
  Bottom 0.254: v12.3,6.67 12.3,9.47 16.24,13.4 16.24,27.93 v16.31,28.01
QWIIC_SCL  (via drill 0.38)
  Top 0.254: R4.1 9.77,37.56 6.39,37.56 4.57,39.38 4.57,40.46 5.03,40.92 J1.4 8.09,40.92 13.48,46.3 J2.5 13.48,51.81 v13.49,51.82
  Bottom 0.254: v13.49,51.82 13.49,49.64 J2.5B
QWIIC_SDA  (via drill 0.38)
  Top 0.254: R3.1 11.26,36.84 6.38,36.84 4.03,39.2 4.03,41 4.94,41.92 J1.3 7.44,41.92 11.03,45.5 11.03,49.67 J2.3 10.94,51.81 v10.95,51.82
  Bottom 0.254: v10.95,51.82 10.95,49.64 J2.3B
RF_IN
  Top 1: 29.03,22.81 J4.FEED
  pour Top (no thermals): 28.53,25.1 29.53,25.1 29.53,22.5 28.53,22.5
RTK_STAT
  Top 0.254: D6.A 20.1,3.92 21.08,2.95 39.28,2.95 41.73,5.4 41.73,20 43.53,21.8 49.93,21.8 51.83,23.7 51.83,32 51.23,32.6 R23.2
RXI2
  Top 0.254: J5.4 39.9,1.87 42.28,4.25 42.28,19.75 43.78,21.25 50.38,21.25 52.43,23.3 52.43,36.6 51.63,37.4 R27.2
RXI/MOSI  (via drill 0.38)
  Top 0.254: R20.2 18.53,38.5 18.03,39 18.03,40.4 21.34,43.71 v21.34,47.34 | J2.19 31.26,51.81 v31.27,51.82 | J2.8 14.86,55.22 v14.76,55.12
  Bottom 0.254: 17.28,48 17.93,47.34 v21.34,47.34 30.03,47.34 31.26,48.58 31.26,49.53 | 31.26,49.53 J2.19B | 17.28,48 17.28,52.47 15.91,53.84 15.91,55.24 | 17.28,48 17.27,48.01 15.77,48.01 14.76,46.99 TP1.P$1 | v31.27,51.82 31.27,49.54 31.26,49.53 | v14.76,55.12 15.79,55.12 15.91,55.24 | 15.91,55.24 J2.8B
SCL/CLK  (via drill 0.38)
  Top 0.254: v19.58,45.47 19.58,43.76 16.63,40.8 16.63,37.4 18.53,35.5 R17.2 | v36.35,51.82 36.35,49.77 J2.23
  Bottom 0.254: TP3.P$1 17.81,44.7 18.57,45.47 v19.58,45.47 19.62,45.5 33.53,45.5 36.34,48.31 J2.23B 36.34,51.81 v36.35,51.82
SDA/!CS  (via drill 0.38)
  Top 0.254: v20.52,46.12 20.42,46.02 20.42,43.9 17.23,40.7 17.23,38.1 18.33,37 R11.2 | J2.24 35.23,55.22 v35.08,55.37
  Bottom 0.254: TP4.P$1 16.46,44.45 18.13,46.12 v20.52,46.12 33.15,46.12 35.03,48 35.03,51.5 36.34,52.81 J2.24B 35.11,55.34 v35.08,55.37
SHIELD  (via drill 0.38)
  other vias: 49.65,3.35 55.26,3.43 49.65,1.22 55.16,1.27
  pour Top: 57.52,5.84 47.66,5.84 47.66,-0.02 57.52,-0.02
  pour Bottom: 57.29,-0.02 47.66,-0.02 47.66,5.84 57.29,5.84
TX_READY  (via drill 0.35, 0.38)
  Top 0.254: J2.29 v43.96,51.79 v43.97,51.8 | R18.2 18.78,34 16.03,36.75 v16.03,42.8
  Bottom 0.254: v43.97,51.8 43.97,49.64 J2.29B 43.96,48.47 46.88,45.55 46.88,44.25 46.5,43.88 19.75,43.88 18.68,42.8 17.53,42.8 v16.03,42.8
TXO2
  Top 0.254: J5.5 42.94,2 42.94,19.66 44.03,20.75 50.98,20.75 53.03,22.8 53.03,38 52.03,39 R26.2
TXO/MISO  (via drill 0.35, 0.38)
  Top 0.254: v18.03,46.75 17.28,47.5 17.28,54.84 v17.3,54.86 18.21,54.86 J2.10 | R19.2 19.18,40.7 22.33,43.85 v22.33,46.76 | J2.21 33.8,51.81 v33.81,51.82
  Bottom 0.254: 33.8,49.53 33.8,47.77 32.79,46.76 v22.33,46.76 v18.04,46.76 v18.03,46.75 16.78,46.75 TP2.P$1 | 33.8,49.53 J2.21B | v33.81,51.82 33.81,49.54 33.8,49.53 | v17.3,54.86 18.08,54.86 J2.10B
V_BATT  (via drill 0.35, 0.38)
  Top 0.254: v34.54,43.28 33.41,42.16 U1.P36 | B1.+ 52.89,46.57 R1.1 50.53,46.54 50.53,45.5 v50.03,45
  Bottom 0.254: v34.54,43.28 46.91,43.28 48.63,45 v50.03,45
V_RF
  Top 0.508: U1.P7 34.51,23.48 R5.2
WT+
  Top 0.254: J3.6 10.75,26.56 R21.1
WT_IN
  Top 0.254: U2.P1 21.37,21.97 19.96,20.56 14.14,20.56 R30.2
WT_OUT  (via drill 0.38)
  Top 0.254: v50.03,28.5 50.03,24.6 48.83,23.4 42.83,23.4 40.03,20.6 40.03,6.2 38.43,4.6 v27.03,4.6 | v51.03,34.2 R28.1 | U$30.P4 20.67,11.35 v20.69,11.32
  Bottom 0.254: v27.03,4.6 21.19,4.6 20.69,5.1 20.69,10.16 | v50.03,28.5 50.03,29.5 51.03,30.5 v51.03,34.2 | v20.69,11.32 20.69,10.16 | TP6.P$1 20.69,10.16
WT_SCHMITT
  Top 0.254: U2.P7 20.1,15.59 R33.1 21.17,14.51 U$30.P2

## Text on the board
Bottom: v10
tPlace: + | -
tDocu: Elias Santistevan